# EAGLE board outer-led (EAGLE 7.2.0)
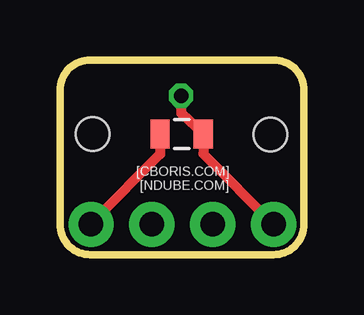
[diagram p0: board, top side]
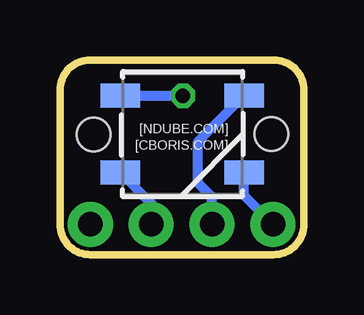
[diagram p1: board, bottom side, seen from below]

Size 10.19 x 8.13 mm. Coordinates in mm from the lower left corner, seen from the top.
Outline: 1.27,8.13 8.91,8.13 arc-90 10.18,6.86 10.18,1.27 arc-90 8.91,0 1.27,0 arc-90 0,1.27 0,6.86 arc-90 1.27,8.13
Copper layers (1*16): Top 0.035mm / dielectric 1.5mm / Bottom 0.035mm
Design rules "default": minimum track width 10mil, minimum drill 24mil, track to track 8mil, track to pad 8mil, pad to pad 8mil, via to via 8mil, smd to smd 8mil, copper to edge 40mil, drill to drill 8mil, minimum pad ring 10mil, minimum via ring 8mil, stop-mask expansion 4mil, vias tented up to drill 0mil, thermal gap 10mil
Holes 1.4 mm at 1.37,5.03 8.79,5

## Footprints (pad centres in the part's own frame; a part is rotated, then mirrored left to right if it is on the bottom)
0805 = smd 0.8 x 1.2: 1 -0.9,0; 2 0.9,0
WS2812B = smd 1.651 x 1: 1 -2.577,1.6; 2 -2.577,-1.6; 3 2.577,-1.6; 4 2.577,1.6
1X04_NO_SILK_ALL_ROUND = drill 1.016 pad 1.88: 1 0,0; 2 2.54,0; 3 5.08,0; 4 7.62,0

## Placement (x,y rotation side)
C2  [0805]  5.08,5.03 180 top
D1  [WS2812B]  5.08,5.03 0 bottom
JP1  [1X04_NO_SILK_ALL_ROUND]  1.3,1.27 0 top

## Library data of the parts
C2 = SparkFun-Capacitors
D1 = SparkFun-LED; PROD_ID: DIO-12503
JP1 = SparkFun-Connectors

## Nets
N$1: C2.2 D1.3 JP1.1
N$2: C2.1 D1.1 JP1.4
N$3: D1.4 JP1.2
N$4: D1.2 JP1.3

## Tracks (layer width: path | path; a pad name or v marks a point on that pad's centre or on a via)
N$1
  Top 0.406: C2.2 4.18,4.19 1.4,1.42 1.33,1.3 JP1.1
  Bottom 0.406: JP1.1 2.52,2.48 D1.3
N$2  (via drill 0.6)
  Top 0.406: JP1.4 5.98,4.21 C2.1 5.05,5.9 v5.05,6.63
  Bottom 0.406: D1.1 5.11,6.63 v5.05,6.63
N$3
  Bottom 0.406: JP1.2 3.84,2.41 4.42,3 4.42,4.71 D1.4
N$4
  Bottom 0.406: JP1.3 6.38,2.15 D1.2

## Text on the board
tPlace: [CBORIS.COM] | [NDUBE.COM]
bPlace: [NDUBE.COM] | [CBORIS.COM]